# EAGLE board ChargerBottomv2 (EAGLE 5.11)
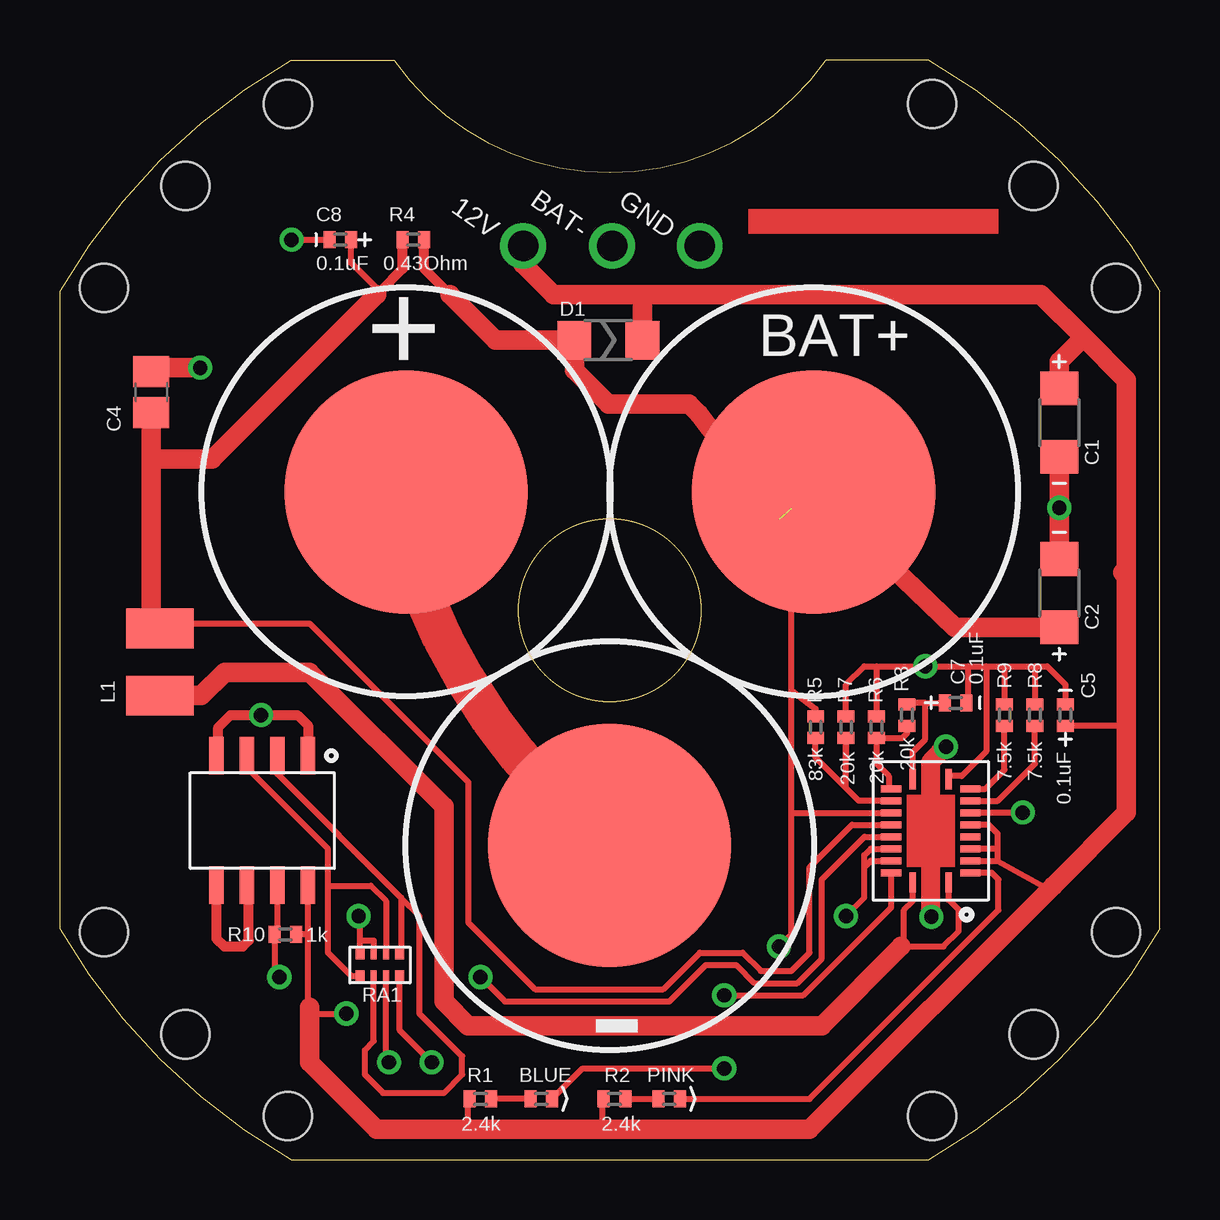
[diagram p0: board, top side]
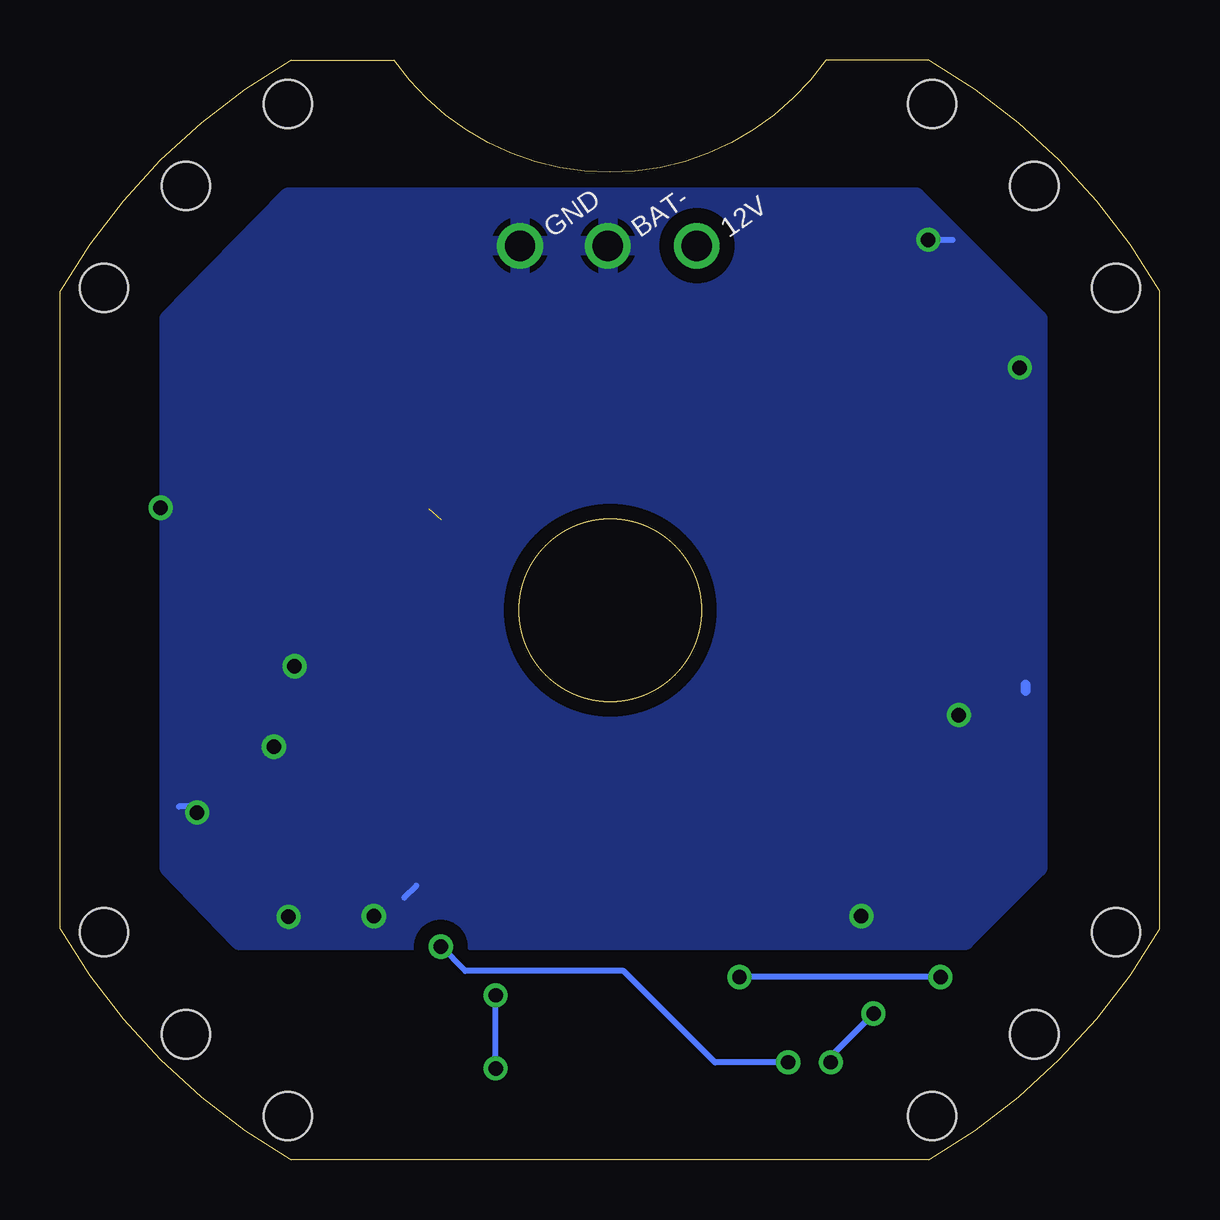
[diagram p1: board, bottom side, seen from below]

Size 45.85 x 45.85 mm. Coordinates in mm from the lower left corner, seen from the top.
Outline: 0,9.63 0,36.22 arc-30 9.63,45.85 13.92,45.85 arc110 31.93,45.85 36.22,45.85 arc-30 45.85,36.22 45.85,9.63 arc-30 36.22,0 9.63,0 arc-30 0,9.63
Outline: circle at 22.91,22.91 radius 3.81
Copper layers (1*16): Top 0.0178mm / dielectric 1.4986mm / Bottom 0.0178mm
Design rules "SSC-EAGLE-2Lyr_v1.0.0.3 *": minimum track width 6mil, minimum drill 14mil, track to track 8mil, track to pad 8mil, pad to pad 8mil, via to via 8mil, smd to smd 8mil, copper to edge 8mil, drill to drill 8mil, minimum pad ring 8mil, minimum via ring 8mil, stop-mask expansion 3mil, vias tented up to drill 0mil, thermal gap 10mil
Holes 2.01 mm at 9.5,1.83 5.23,5.23 1.83,9.5 1.83,36.35 5.23,40.59 9.5,44.02 36.35,44.02 40.59,40.59 44.02,36.35 44.02,9.5 40.59,5.23 36.35,1.83
tKeepout: area 43.9,9.4 to 46,36.3; area 0,9.4 to 2,36.3; area 9.4,0 to 36.6,1.8; area 9.4,43.9 to 36.3,46

## Footprints (pad centres in the part's own frame; a part is rotated, then mirrored left to right if it is on the bottom)
INDIVIDUAL_THROUGH_HOLE_0.05 = drill 1.27 round: P$1 0,0
RC123A_PAD = smd 10.16 x 10.16: P$1 0,0
LED0402 = smd 0.5 x 0.7: 1 -0.45,0; 2 0.45,0
C1206 = smd 1.4 x 1.6: NEG -1.422,0; POS 1.422,0
C0805 = smd 1.3 x 1.5: 1 -0.85,0; 2 0.85,0
C0402 = smd 0.5 x 0.7: NEG -0.45,0; POS 0.45,0
D1206 = smd 1.4 x 1.6: NEG -1.422,0; POS 1.422,0
L1210 = smd 1.651 x 2.794: P$1 -1.397,0; P$2 1.397,0
R0402 = smd 0.5 x 0.7: 1 -0.45,0; 2 0.45,0
4XR0402 = smd 0.368 x 0.5: P$1 -0.826,0.475; P$4 0.826,0.475; P$5 0.826,-0.475; P$8 -0.826,-0.475 | smd 0.254 x 0.5: P$2 -0.254,0.475; P$3 0.254,0.475; P$6 0.254,-0.475; P$7 -0.254,-0.475
20-QFN = smd 0.85 x 0.28: P$1 -2.15,-0.75; P$10 2.15,-0.75; P$11 2.15,0.75; P$20 -2.15,0.75 | smd 0.28 x 0.85: P$2 -1.75,-1.65; P$3 -1.25,-1.65; P$4 -0.75,-1.65; P$5 -0.25,-1.65; P$6 0.25,-1.65; P$7 0.75,-1.65; P$8 1.25,-1.65; P$9 1.75,-1.65; P$12 1.75,1.65; P$13 1.25,1.65; P$14 0.75,1.65; P$15 0.25,1.65; P$16 -0.25,1.65; P$17 -0.75,1.65; P$18 -1.25,1.65; P$19 -1.75,1.65
LM211-SOIC = smd 0.6 x 1.55: P$1 -1.905,-2.7; P$2 -0.635,-2.7; P$3 0.635,-2.7; P$4 1.905,-2.7; P$5 1.905,2.7; P$6 0.635,2.7; P$7 -0.635,2.7; P$8 -1.905,2.7

## Placement (x,y rotation side)
12V  INDIVIDUAL_THROUG_HOLEDIA0.05  [INDIVIDUAL_THROUGH_HOLE_0.05]  19.3,38.1 145 top
BAT1  RC123A_PAD  [RC123A_PAD]  22.91,13.11 0 top
BAT2  RC123A_PAD  [RC123A_PAD]  14.43,27.84 0 top
BAT+  RC123A_PAD  [RC123A_PAD]  31.42,27.84 0 top
BAT-  INDIVIDUAL_THROUG_HOLEDIA0.05  [INDIVIDUAL_THROUGH_HOLE_0.05]  23.01,38.1 145 top
BLUE  LED  [LED0402]  20.07,2.54 0 top
C1  10uF  [C1206]  41.66,30.73 90 top
C2  10uF  [C1206]  41.66,23.62 270 top
C4  4.7uF  [C0805]  3.81,32 270 top
C5  0.1uF  [C0402]  41.91,18.54 270 top
C7  0.1uF  [C0402]  37.34,19.05 180 top
C8  0.1uF  [C0402]  11.68,38.35 0 top
D1  DIODE-1206  [D1206]  22.86,34.16 0 top
GND  INDIVIDUAL_THROUG_HOLEDIA0.05  [INDIVIDUAL_THROUGH_HOLE_0.05]  26.67,38.1 145 top
L1  22uH  [L1210]  4.17,20.75 90 top
PINK  LED  [LED0402]  25.4,2.54 0 top
R1  2.4k  [R0402]  17.53,2.54 180 top
R2  2.4k  [R0402]  23.11,2.54 180 top
R3  20k  [R0402]  35.31,18.54 90 top
R4  0.43Ohm  [R0402]  14.73,38.35 0 top
R5  83k  [R0402]  31.5,18.03 90 top
R6  20k  [R0402]  34.04,18.03 270 top
R7  20k  [R0402]  32.77,18.03 270 top
R8  7.5k  [R0402]  40.64,18.54 270 top
R9  7.5k  [R0402]  39.37,18.54 270 top
R10  1k  [R0402]  9.4,9.4 0 top
RA1  RESISTOR_ARRAY  [4XR0402]  13.34,8.13 0 top
U$1  BQ24105-RHLR  [20-QFN]  36.3,13.72 90 top
U$2  TI-LM211  [LM211-SOIC]  8.43,14.15 180 top

## Library data of the parts
12V BAT1 BAT2 BAT+ BAT- GND = Connectors
BLUE = Passives; MANUFACTURER: Vishay; MAN_PART_NO: VLMB1500-GS08; PRICE_1: 0.62; PRICE_50: 0.35; URL: http://www.digikey.com/product-detail/en/VLMB1500-GS08/VLMB1500-GS08CT-ND/3504671; VENDOR: Digikey
C1 C2 = Passives; MANUFACTURER: Taiyo Yuden; MAN_PART_NO: TMK316F106ZL-T; PRICE_1: 0.21; PRICE_50: 0.08500; URL: http://www.digikey.com/product-detail/en/TMK316F106ZL-T/587-1353-1-ND/931130; VENDOR: Digikey
C4 = Passives; MANUFACTURER: TDK Corporation; MAN_PART_NO: C2012X5R1C475K/1.25; PRICE_1: 0.24; PRICE_50: 0.165; URL: http://www.digikey.com/product-detail/en/C2012X5R1C475K%2F1.25/445-7640-1-ND/2733712; VENDOR: Digikey
C5 = Passives; MANUFACTURER: Murata; MAN_PART_NO: GRM155R61C104KA88D; PRICE_50: 0.00920; URL: http://search.digikey.com/us/en/products/GRM155R61C104KA88D/490-5415-1-ND/2175222; VENDOR: Digikey
C7 = Passives; MANUFACTURER: Murata; MAN_PART_NO: GRM155R61C104KA88D; PRICE_1: 0.00920; URL: http://search.digikey.com/us/en/products/GRM155R61C104KA88D/490-5415-1-ND/2175222; VENDOR: Digikey
C8 = Passives; MANUFACTURER: Murata; MAN_PART_NO: GRM155R61C104KA88D; PRICE_50: 0.00920; URL: http://www.digikey.com/product-detail/en/GRM155R61C104KA88D/490-5415-1-ND/2175222?cur=USD; VENDOR: Digikey
D1 = Passives; MANUFACTURER: AVX; MAN_PART_NO: SD1206S040S2R0; PRICE_1: 0.53; PRICE_50: 0.503; URL: http://www.digikey.com/product-detail/en/SD1206S040S2R0/478-7806-1-ND/3749539; VENDOR: Digikey
L1 = Passives; MANUFACTURER: Taiyo Yuden; MAN_PART_NO: CBC3225T220MR; PRICE_1: 0.23; PRICE_50: 0.1988; URL: http://www.digikey.com/product-detail/en/CBC3225T220MR/587-1626-1-ND/1008241; VENDOR: Digikey
PINK = Passives; MANUFACTURER: Rohm; MAN_PART_NO: SMLP12HBC7W1; PRICE_1: 0.67; PRICE_50: 0.432; URL: http://www.digikey.com/product-detail/en/SMLP12HBC7W1/846-1109-1-ND/3587027; VENDOR: Digikey
R1 R2 = Passives; MANUFACTURER: Stackpole; MAN_PART_NO: RMCF0402JT2K40; PRICE_1: 0.02; PRICE_50: 0.0092; URL: http://www.digikey.com/product-detail/en/RMCF0402JT2K40/RMCF0402JT2K40CT-ND/2417862; VENDOR: Digikey
R3 R6 R7 R9 = Passives; MANUFACTURER: Susumu; MAN_PART_NO: RR0510P-203-D; PRICE_1: 0.08; PRICE_50: 0.04740; URL: http://www.digikey.com/product-detail/en/RR0510P-203-D/RR05P20.0KDCT-ND/432966; VENDOR: Digikey
R4 = Passives; MANUFACTURER: Digikey; MAN_PART_NO: RL0510S-R10-F; PRICE_1: 0.49; PRICE_50: 0.23540; URL: http://www.digikey.com/product-detail/en/RL0510S-R10-F/408-1447-1-ND/2734825; VENDOR: Digikey
R5 = Passives; MANUFACTURER: TE Connectivity; MAN_PART_NO: 4-1879213-8; PRICE_1: 0.41; PRICE_50: 0.28560; URL: http://www.digikey.com/product-detail/en/4-1879213-8/A102994CT-ND/2729527; VENDOR: Digikey
R8 = Passives; MANUFACTURER: Susumu; MAN_PART_NO: RR0510P-752-D; PRICE_1: 0.08; PRICE_50: 0.04740; URL: http://www.digikey.com/product-detail/en/RR0510P-752-D/RR05P7.5KDCT-ND/432957; VENDOR: Digikey
R10 = Passives; MANUFACTURER: Rohm; MAN_PART_NO: MCR01MRTJ102; PRICE_50: 0.01260; URL: http://search.digikey.com/us/en/products/MCR01MRTJ102/RHM1.0KCECT-ND/2796444; VENDOR: Digikey
RA1 = Passives; MANUFACTURER: Panasonic; MAN_PART_NO: EXB-28V104JX; PRICE_1: 0.20000; PRICE_50: 0.07820; URL: http://search.digikey.com/us/en/products/CRA04S08310K0JTD/CRA4S810KCT-ND/1285629; VENDOR: Digikey
U$1 = Devices; MANUFACTURER: TI; MAN_PART_NO: BQ24105RHLR; PRICE_1: 6.97; PRICE_50: 5.69720; URL: http://www.digikey.com/product-detail/en/BQ24105RHLR/296-17159-1-ND/665958; VENDOR: Digikey
U$2 = Devices; MANUFACTURER: TI; MAN_PART_NO: LM211DR; PRICE_1: 0.54; PRICE_50: 0.3972; URL: http://www.digikey.com/product-detail/en/LM211DR/296-14589-1-ND/555595; VENDOR: Digikey

## Nets
12V: 12V.P$1 C1.POS C5.POS D1.POS R1.2 R2.2 R10.2 RA1.P$6 U$1.P$3 U$1.P$4 U$1.P$6 U$2.P$8
BAT+: BAT+.P$1 C2.POS D1.NEG R4.2 R5.2 RA1.P$5 U$1.P$14
GND: BAT-.P$1 C1.NEG C2.NEG C4.1 C5.NEG C7.NEG C8.NEG GND.P$1 R6.1 R7.1 R8.1 R9.1 RA1.P$1 RA1.P$2 U$1.P$7 U$1.P$10 U$1.P$17 U$1.P$18 U$2.P$1 U$2.P$4
N$1: U$2.P$5 U$2.P$6
N$2: R10.1 U$1.P$16 U$2.P$7
N$4: RA1.P$4 RA1.P$7 U$2.P$2
N$5: RA1.P$3 RA1.P$8 U$2.P$3
N$6: C4.2 C8.POS L1.P$2 R4.1 U$1.P$15
N$7: R9.2 U$1.P$9
N$8: R8.2 U$1.P$8
N$9: BLUE.1 R1.1
N$10: BLUE.2 U$1.P$19
N$11: PINK.1 R2.1
N$12: L1.P$1 U$1.P$1 U$1.P$20
N$13: R5.1 R7.2 U$1.P$13
N$14: BAT1.P$1 BAT2.P$1
N$15: PINK.2 U$1.P$2
N$18: R3.1 R6.2 U$1.P$12
N$19: U$1.P$5
N$22: C7.POS R3.2 U$1.P$11

## Tracks (layer width: path | path; a pad name or v marks a point on that pad's centre or on a via)
12V  (via drill 0.6)
  Top 0.254: U$1.P$6 38.71,13.97 39.09,13.59 39.09,12.97 | U$1.P$3 37.97,12.45 39.09,12.45 | 39.09,12.97 U$1.P$4 | R2.2 22.61,2.6 22.61,1.27 | 10.34,9.4 10.34,6.43 10.41,6.35 | 10.34,9.4 U$2.P$8 | 10.34,9.4 R10.2 | 28.19,36.07 28.45,36.32 | 39.09,12.45 39.09,12.97 | 39.09,12.45 41.38,11.18 41.4,11.43 | C5.POS 44.14,18.09 44.45,17.78 | R1.2 17.02,2.48 17.02,1.27 | RA1.P$6 13.59,4.19 v13.72,4.06 | v11.94,6.1 10.16,6.1 10.41,5.84
  Top 0.813: 12V.P$1 19.3,37.34 20.57,36.07 24.13,36.07 | 24.13,36.07 28.19,36.07 40.89,36.07 42.67,34.29 | 42.67,34.29 44.45,32.51 44.45,24.64 | 44.45,24.64 44.45,17.78 44.45,14.48 41.4,11.43 31.24,1.27 22.61,1.27 17.02,1.27 13.21,1.27 10.41,4.06 10.41,5.84 10.41,6.35 | 44.45,24.64 44.3,24.49 | C1.POS 41.66,33.27 42.67,34.29 | D1.POS 24.28,35.92 24.13,36.07
  Bottom 0.254: v13.72,4.06 13.72,4.32 v11.94,6.1
BAT+  (via drill 0.6)  (1 unrouted)
  Top 0.254: BAT+.P$1 30.48,27.15 30.48,19.56 | v29.97,8.89 30.48,9.4 30.48,14.48 | 30.48,14.48 30.48,19.56 | R5.2 31.5,18.8 30.48,19.56 | U$1.P$14 30.49,14.47 30.48,14.48 | RA1.P$5 14.16,5.4 v15.49,4.06
  Top 0.406: R4.2 15.18,37.14 16.26,36.07
  Top 0.813: 29.97,26.7 26.62,31.09 26.22,31.5 22.86,31.5 21.44,32.92 D1.NEG 18.16,34.16 16.26,36.07 | C2.POS 37.31,22.2 BAT+.P$1
  Bottom 0.254: v29.97,8.89 28.96,7.87 22.35,7.87 20.07,5.59 18.54,4.06 v15.49,4.06
GND  (via drill 0.6)
  Top 0.254: 34.63,12.95 U$1.P$17 33.79,12.97 33.53,12.7 33.53,12.19 | U$1.P$10 37.05,15.96 37.08,16 37.59,16 38.61,17.02 38.61,20.57 | 37.85,20.57 v36.07,20.57 34.04,20.57 | 37.85,20.57 38.61,20.57 | 39.37,20.57 R9.1 | 38.61,20.57 39.37,20.57 | 40.64,20.57 R8.1 | 39.37,20.57 40.64,20.57 | C5.NEG 41.91,19.81 41.15,20.57 40.64,20.57 | 34.04,20.57 R6.1 | R7.1 32.77,19.81 33.53,20.57 34.04,20.57 | RA1.P$1 12.51,9.14 | 12.51,9.14 12.51,10.1 v12.45,10.16 | RA1.P$2 13.08,9.14 12.51,9.14 | U$1.P$7 v40.13,14.48 | C7.NEG 37.85,19.11 37.85,20.57 | U$1.P$18 33.8,12.47 33.53,12.19 | 33.53,12.19 33.53,10.92 v32.77,10.16 | v9.65,38.35 C8.NEG
  Top 0.406: U$2.P$4 6.6,16.92 6.6,18.03 7.11,18.54 v8.38,18.54 9.91,18.54 10.34,18.11 U$2.P$1
  Top 0.813: C1.NEG v41.66,27.18 C2.NEG | C4.1 4.15,33.02 v5.84,33.02
  Bottom 0.254: 31.5,10.92 30.99,11.43 | v40.13,14.48 40.39,14.73 40.89,14.73 | v9.65,38.35 8.64,38.35
  Bottom 0.406: 5.59,19.56 5.59,19.81
  other vias: 36.32,10.13 36.93,17.22
  pour Bottom (isolate 0.61): 10.16,40.13 36.32,40.13 41.3,35.05 41.3,12.19 38.35,9.14 8.13,9.14 5.08,12.19 5.08,35.05
N$1
  Top 0.406: U$2.P$5 6.53,9.22 6.86,8.89 7.62,8.89 7.87,9.14 7.87,11.37 U$2.P$6
N$2  (via drill 0.6)
  Top 0.254: U$2.P$7 9.07,9.26 R10.1 8.95,7.82 v9.14,7.62 | U$1.P$16 33.53,13.47 31.75,11.68 31.75,8.38 30.73,7.37 28.96,7.37 28.19,8.13 26.92,8.13 25.4,6.6 18.54,6.6 v17.53,7.62
  Bottom 0.254: v9.14,7.62 v17.53,7.62
N$3
  Top 0.762: 36.93,17.25 36.3,16.61
N$4
  Top 0.254: U$2.P$2 9.07,16.08 14.22,10.92 | 14.22,10.92 14.99,10.16 14.99,6.1 16.76,4.32 16.76,3.56 16,2.79 13.46,2.79 12.7,3.56 12.7,4.57 13.08,4.95 RA1.P$7 | RA1.P$4 14.22,8.67 14.22,10.92
N$5
  Top 0.254: U$2.P$3 7.8,16.33 11.18,12.95 11.18,11.43 | RA1.P$8 12.16,7.65 11.18,8.64 11.18,11.43 | RA1.P$3 13.59,10.79 12.95,11.43 11.18,11.43
N$6
  Top 0.254: L1.P$2 4.37,22.35 10.41,22.35 17.02,15.75 17.02,9.91 19.81,7.11 25.15,7.11 26.67,8.64 28.45,8.64 29.21,7.87 30.48,7.87 31.24,8.64 31.24,12.19 33.02,13.97 U$1.P$15 | C8.POS 12.13,37.4 13.34,36.2
  Top 0.406: R4.1 14.28,37.14 13.34,36.2 13.21,36.07
  Top 0.813: 3.81,29.21 3.81,22.15 L1.P$2 | 3.81,29.21 C4.2 | 13.21,36.07 6.35,29.21 3.81,29.21
N$7
  Top 0.254: U$1.P$9 38.58,15.47 39.37,16.26 R9.2
N$8
  Top 0.254: U$1.P$8 39.1,14.97 40.64,16.51 R8.2
N$9
  Top 0.254: BLUE.1 R1.1
N$10  (via drill 0.6)
  Top 0.254: v27.69,6.86 30.99,6.86 34.65,10.52 U$1.P$19 | BLUE.2 21.79,3.81 v27.69,3.81
  Bottom 0.254: v27.69,3.81 v27.69,6.86
N$11
  Top 0.254: R2.1 PINK.1
N$12
  Top 0.254: U$1.P$1 37.05,10.83 37.47,10.41 37.47,9.53 36.83,8.89 35.05,8.89 35.18,9.02 35.18,10.41 35.55,10.78 U$1.P$20
  Top 0.813: 35.05,8.89 31.75,5.59 17.02,5.59 16,6.6 16,14.73 10.41,20.32 6.86,20.32 5.89,19.36 L1.P$1 4.37,19.56
N$13
  Top 0.254: 32.77,16.76 R7.2 32.77,15.49 | U$1.P$13 33.29,14.97 32.77,15.49 | 32.77,15.49 31.5,16.76 R5.1
N$14
  Top 0.813: 21.23,11.94 BAT1.P$1
  Top 1.676: BAT1.P$1 21.84,13.97 arc-30 14.48,25.4 BAT2.P$1
N$15
  Top 0.254: PINK.2 31.24,2.54 39.12,10.41 39.12,11.68 38.83,11.97 U$1.P$2
N$18
  Top 0.254: U$1.P$12 34.54,15.57 34.54,16 34.04,16.51 R6.2 35.11,17.58 35.31,17.78 R3.1
N$22
  Top 0.254: R3.2 35.36,19.05 36.07,19.05 | 36.07,19.05 C7.POS | U$1.P$11 35.55,17 36.07,17.53 36.07,19.05
(copper drawn outside any net)
  shapes: Top area x3

## Text on the board
tNames: BAT+ | + | -
tStop: CREATIVEMACHINES.CORNELL.EDU